# EAGLE board boosta (EAGLE 9.1.0)

Size 65.04 x 30.2 mm. Coordinates in mm from the lower left corner, seen from the top.
Outline: 0,27.2 0,3 arc90 3,0 62.04,0 arc90 65.04,3 65.04,27.2 arc90 62.04,30.2 3,30.2 arc90 0,27.2
Copper layers (1*16): Top 0.035mm / dielectric 1.5mm / Bottom 0.035mm
Design rules "default": minimum track width 6mil, minimum drill 0.35mm, track to track 6mil, track to pad 6mil, pad to pad 6mil, via to via 6mil, smd to smd 6mil, copper to edge 40mil, drill to drill 6mil, minimum pad ring 10mil, minimum via ring 8mil, stop-mask expansion 4mil, vias tented up to drill 0mil, thermal gap 10mil
Holes 3 mm at 61.5,26.5 3.6,26.5 3.6,3.3 61.5,3.3

## Footprints (pad centres in the part's own frame; a part is rotated, then mirrored left to right if it is on the bottom)
C0603 = smd 1.1 x 1: 1 -0.85,0; 2 0.85,0
2X20 = drill 1.016 pad 1.88: 1 0,0; 2 0,2.54; 3 2.54,0; 4 2.54,2.54; 5 5.08,0; 6 5.08,2.54; 7 7.62,0; 8 7.62,2.54; 9 10.16,0; 10 10.16,2.54; 11 12.7,0; 12 12.7,2.54; 13 15.24,0; 14 15.24,2.54; 15 17.78,0; 16 17.78,2.54; 17 20.32,0; 18 20.32,2.54; 19 22.86,0; 20 22.86,2.54; 21 25.4,0; 22 25.4,2.54; 23 27.94,0; 24 27.94,2.54; 25 30.48,0; 26 30.48,2.54; 27 33.02,0; 28 33.02,2.54; 29 35.56,0; 30 35.56,2.54; 31 38.1,0; 32 38.1,2.54; 33 40.64,0; 34 40.64,2.54; 35 43.18,0; 36 43.18,2.54; 37 45.72,0; 38 45.72,2.54; 39 48.26,0; 40 48.26,2.54
JST-2-SMD = smd 1 x 4.6: 1 -1,-3.7; 2 1,-3.7 | smd 1.6 x 3.4: NC1 -3.4,1.5; NC2 3.4,1.5
L4532M = smd 2 x 2.4: 1 -1.9,0; 2 1.9,0
CHIP-LED0603 = smd 0.8 x 0.8: A 0,-0.75; C 0,0.75
SOT23-3 = smd 0.8 x 0.9: 1 -0.95,-1; 2 0.95,-1; 3 0,1.1
MOLEX-1X6 = drill 1.016 pad 1.88: 1 0,0; 2 2.54,0; 3 5.08,0; 4 7.62,0; 5 10.16,0; 6 12.7,0
0603 = smd 1.1 x 1: 1 -0.85,0; 2 0.85,0
1X03 = drill 1.016 pad 1.88: 1 0,0; 2 2.54,0; 3 5.08,0
SON50P300X300X100-10N = smd 0.76 x 0.26: 1 -1.385,1; 2 -1.385,0.5; 3 -1.385,0; 4 -1.385,-0.5; 5 -1.385,-1; 6 1.385,-1; 7 1.385,-0.5; 8 1.385,0; 9 1.385,0.5; 10 1.385,1 | smd 1.6 x 2.15: 11 0,0 | drill 0.2 pad 0.3: P$1 0,0; P$2 0.5,0.75; P$3 -0.5,0.75; P$4 -0.5,-0.75; P$5 0.5,-0.75

## Placement (x,y rotation side)
C1  22uF  [C0603]  49.17,12.54 270 top
C2-A  22uF  [C0603]  40.82,19.14 180 top
C2-B  22uF  [C0603]  40.67,16.74 180 top
C2-C  22uF  [C0603]  40.62,14.24 180 top
C3  10nF  [C0603]  41.22,7.82 0 top
J1  [2X20]  8.26,25.32 0 top
J2  [JST-2-SMD]  60.82,15.15 270 top
L1  [L4532M]  45.68,12.62 90 top
LED1  [CHIP-LED0603]  52,9 90 top
MCP100  LM4051  [SOT23-3]  49.2,5.4 90.1 top
MPU925  [MOLEX-1X6]  4.76,7.92 90 top
R1  402K  [0603]  52.71,4.42 90 top
R2  100K  [0603]  41.5,5.42 180 top
R3  1M  [0603]  45.29,18.02 180 top
R4  3.3k  [0603]  46,5.3 90 top
SERVO  [1X03]  12.22,4.12 90 top
U1  TPS61232DRCR  [SON50P300X300X100-10N]  41.53,10.99 270 top

## Library data of the parts
C1 C2-A C2-B C2-C C3 = rcl; SPICEPREFIX: C
J1 MPU925 SERVO = SparkFun-Connectors
J2 = SparkFun-Connectors; PROD_ID: CONN-11443; SF_ID: PRT-08612
L1 = rcl; SPICEPREFIX: L
LED1 = led
MCP100 = SparkFun-DiscreteSemi; PROD_ID: IC-13134
R1-R3 = SparkFun-Resistors; PROD_ID: RES-08306
R4 = SparkFun-Resistors; PROD_ID: RES-07851
U1 = TPS61232DRCR; DESCRIPTION: High Efficiency Synchronous Step Up Converter With 5A Switch 10-VSON -40 to 85; DIGI-KEY_PART_NUMBER: 296-44498-1-ND; DIGI-KEY_PURCHASE_URL: https://www.digikey.com/product-detail/en/texas-instruments/TPS61232DRCR/296-44498-1-ND/6110782?utm_source=snapeda&utm_medium=aggregator&utm_campaign=symbol; MF: Texas Instruments; MP: TPS61232DRCR; PACKAGE: VSON-10 Texas Instruments

## Nets
N$1: L1.1 U1.1
N$2: C1.1 J2.2 L1.2 MCP100.2 U1.9 U1.10
N$3: R3.2 U1.5
N$4: MCP100.1 R4.1
N$5: C2-A.1 C2-B.1 C2-C.1 J1.2 J1.4 LED1.A R1.2 SERVO.2 U1.3
N$6: C3.1 U1.6
N$7: R1.1 R2.2 U1.7
N$8: J1.6 SERVO.3
N$9: J1.33 SERVO.1
N$10: J1.1 J1.17 MPU925.6
N$11: J1.5 MPU925.4
N$12: J1.3 MPU925.3
N$13: LED1.C R4.2
N$15: C1.2 C2-A.2 C2-B.2 C2-C.2 C3.2 J1.9 J1.14 J1.20 J1.25 J1.30 J1.34 J1.39 J2.1 MCP100.3 MPU925.5 R2.1 R3.1 U1.11
SW2: U1.2
VOUT2: U1.4

## Tracks (layer width: path | path; a pad name or v marks a point on that pad's centre or on a via)
N$1  (1 unrouted)
N$2  (5 unrouted)
N$3  (1 unrouted)
N$4  (1 unrouted)
N$5  (8 unrouted)
N$6  (1 unrouted)
N$7  (2 unrouted)
N$8  (1 unrouted)
N$9  (1 unrouted)
N$10  (2 unrouted)
N$11  (1 unrouted)
N$12  (1 unrouted)
N$13  (1 unrouted)
N$15  (17 unrouted)